# Altium PCB System Control.PcbDoc (part 2 of 7)
Units mil, origin at the board's own origin, x right, y up, seen from the top; angles counter-clockwise.
Board outline 5312.56 x 5103.22 mil, 12 copper layers (Top, GND 2, Signal 3, Signal 4, 3.3V 5, Signal 6, Signal 7, 2.5V 8, Signal 9, Signal 10, GND 11, Bottom); 503 components, 484 nets, 2219 pads, 1158 vias.
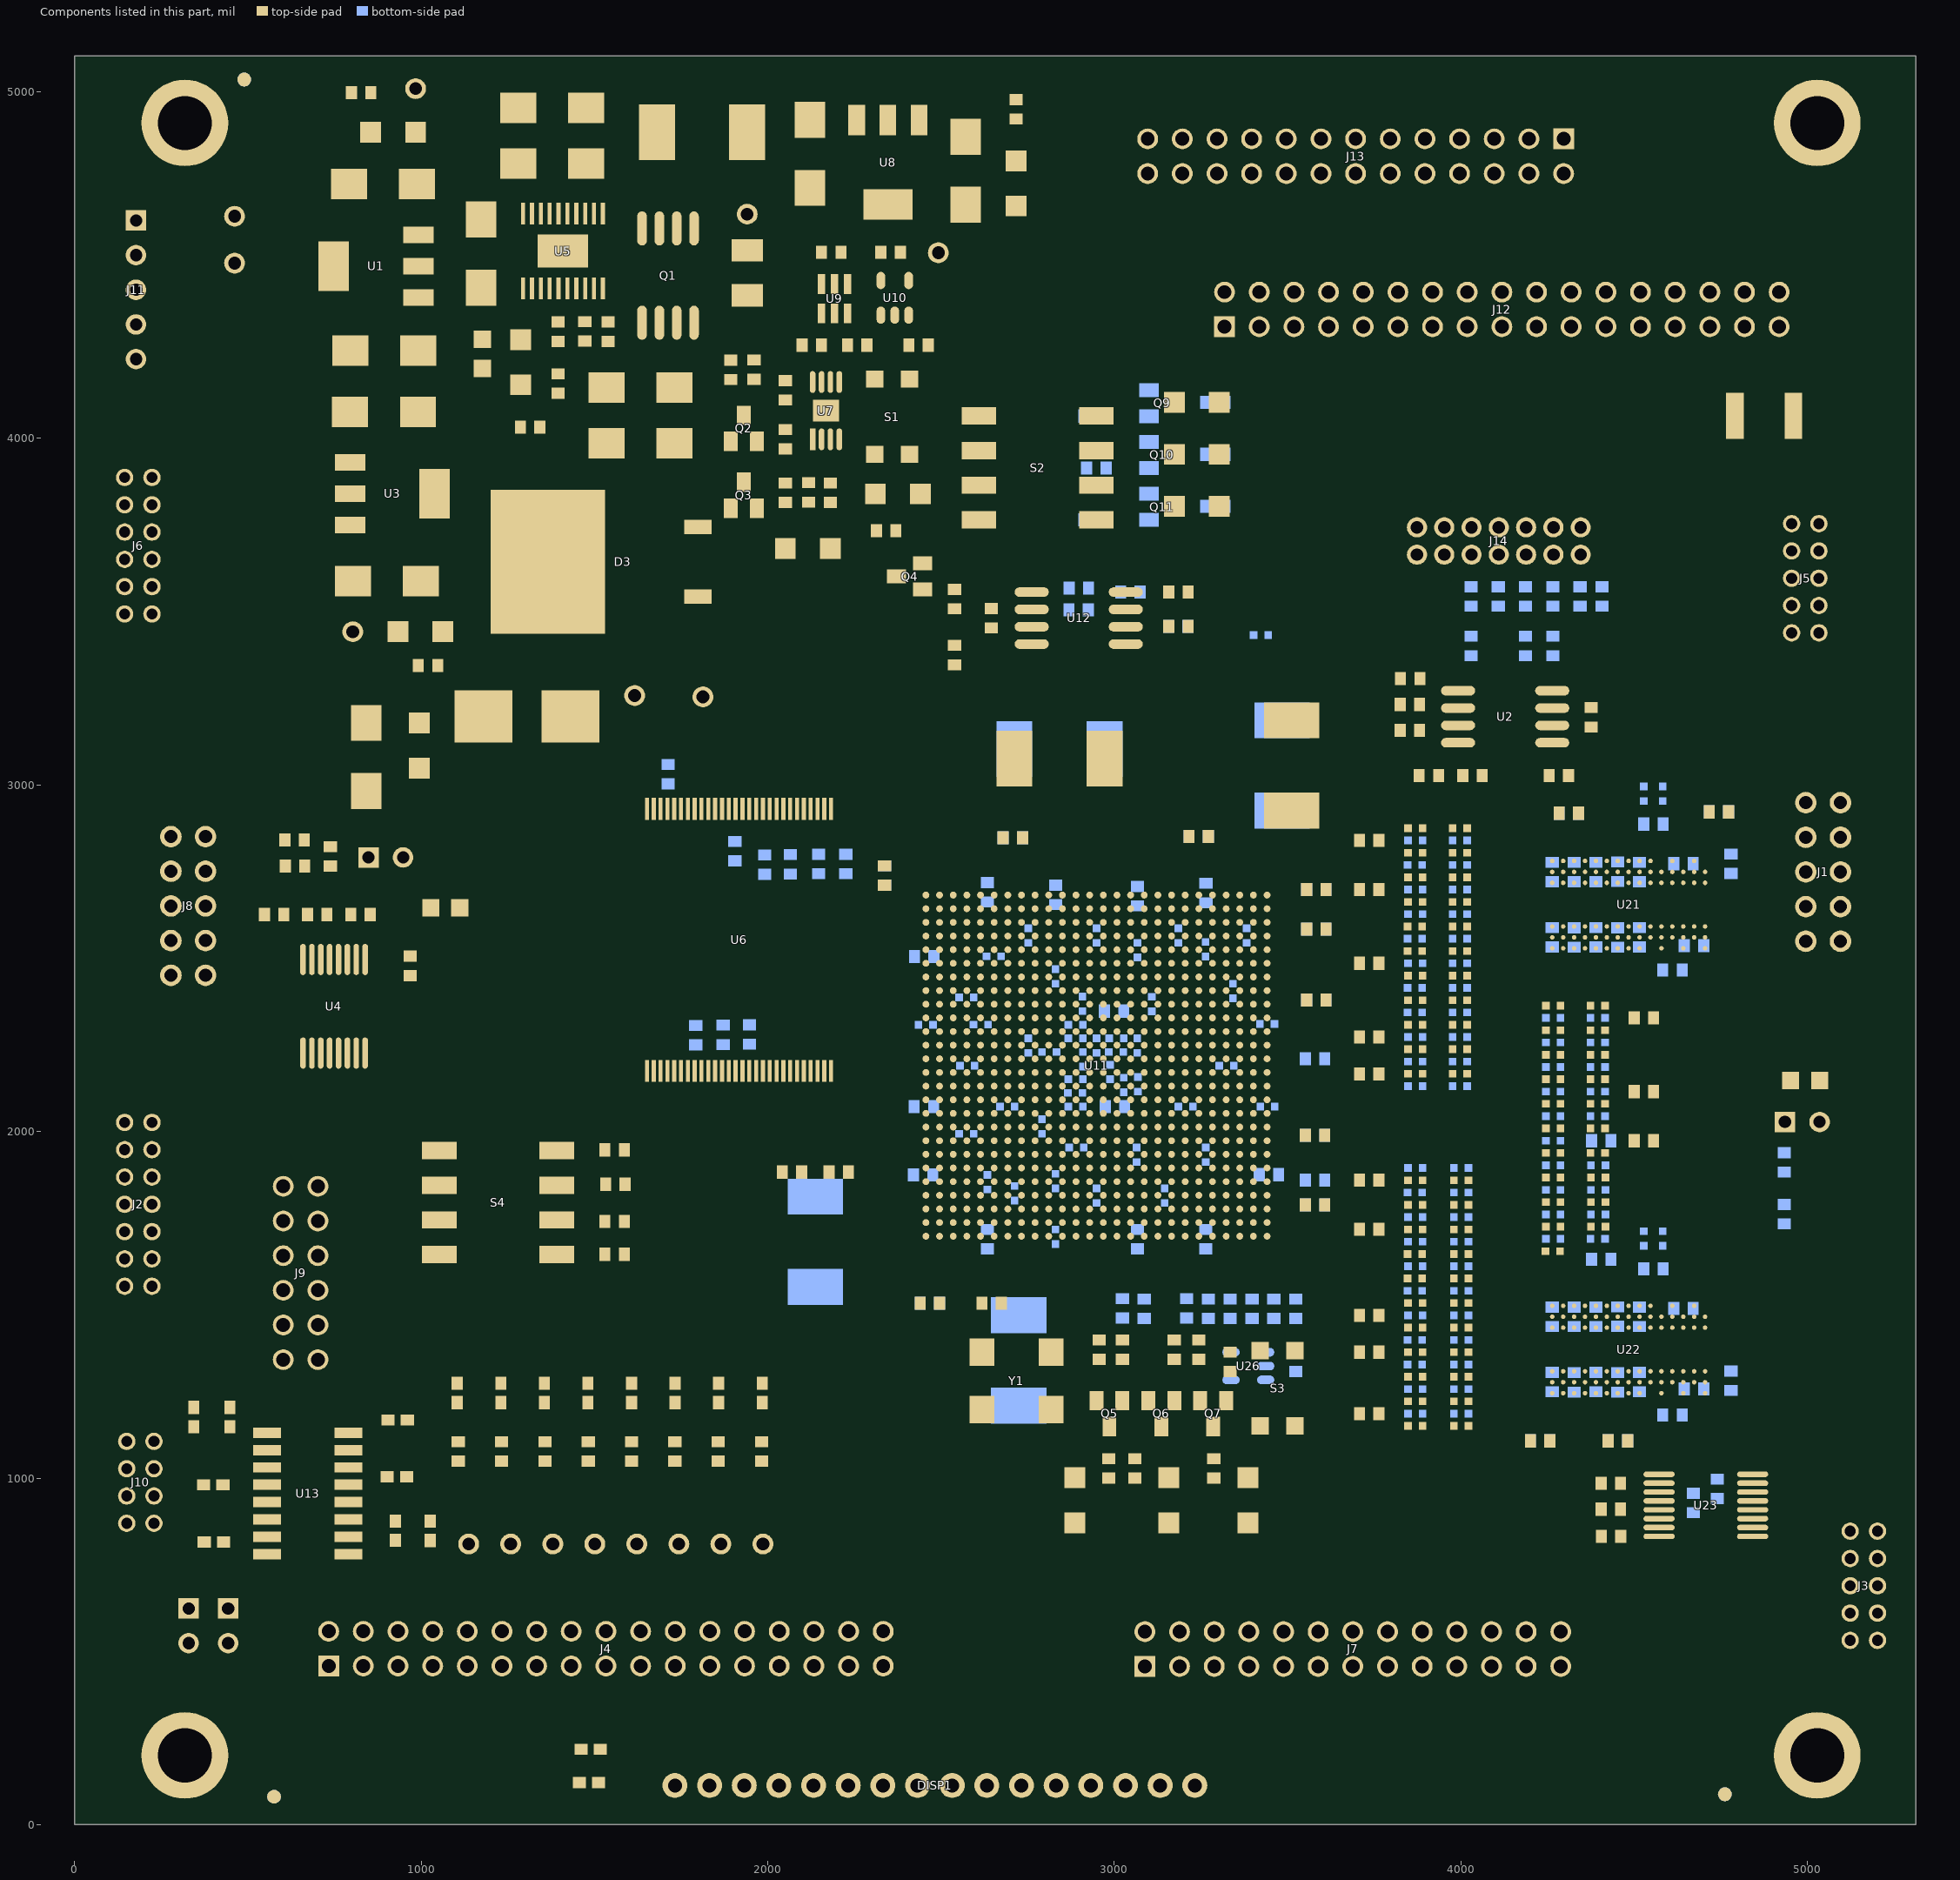
[diagram p12: the components of this part, seen from the top]

## Components (designator, comment, footprint, x,y, rotation, side; value= is the part's Value field where it differs from the comment) (continued)
C4 "10uF 25V" SM/CT_6032 802.71,3587.79 r0 top
C5 "0.1uF 50V" SM/C_0603 737.74,2765.97 r90 top
C6 "1uF 25V" SM/C_0603 968,2506 r270 top
C7 "0.1uF 50V" SM/C_1206 995.03,3178.9 r270 top
C8 "10uF 25V" SM/CT_6032 841.48,3178.9 r270 top
C9 "10uF 25V" SM/CT_6032 1172.78,4631.1 r270 top
C10 "0.1uF 50V" SM/C_0603 852.74,2625.97 r180 top
C11 "10uF 25V" SM/CT_6032 1475.93,4953.94 r180 top
C12 "10uF 25V" SM/CT_6032 1475.93,4792.52 r180 top
C13 "1uF 25V" SM/C_0603 547.74,2625.97 r0 top
C14 "1uF 25V" SM/C_0603 727.74,2625.97 r180 top
C15 "4.7uF" SM/C_0603 1395.22,4186.22 r270 top
C16 "DNP" SM/C_0603 662.74,2840.97 r180 top
C17 "0.033uF" SM/C_0603 1538.93,4335.83 r270 top
C18 "0.1uF 50V" SM/C_0603 4375.4,3167.23 r90 top
C19 "DNP" SM/C_0603 4005.4,3027.23 r0 top
C20 "DNP" SM/C_0603 3880.4,3232.23 r180 top
C21 "0.1uF 50V" SM/C_0603 1472,4280.71 r90 top
C22 "10uF 25V" SM/CT_6032 1534.99,4146.85 r0 top
C23 "10uF 25V" SM/CT_6032 1534.99,3985.43 r0 top
C25 "100uF 25V" SM/CT_7360 1940.5,4883.07 r180 top
C31 "DNP" SM/C_0603 1960.18,4170.47 r90 top
C32 "0.1uF 50V" SM/C_0603 1905,2837 r270 bottom
C34 "0.1uF 50V" SM/C_0603 2050.74,4166.53 r270 top
C35 "470uF 10V" SM/CT_7360 2971.41,3076.1 r180 top
C36 "4.7uF" SM/C_0603 2097.98,1883.07 r180 top
C37 "10uF 25V" SM/CT_6032 2121.6,4918.5 r270 top
C38 "10uF 25V" SM/CT_6032 2570.42,4674.41 r90 top
C42 "0.1uF 50V" SM/C_0603 2155.07,4536.61 r0 top
C43 "4.7uF" SM/C_0603 2176.72,1883.07 r0 top
C44 "0.1uF 50V" SM/C_0603 2326.33,4536.61 r0 top
C45 "4.7uF" SM/C_0603 2336.93,2710.69 r90 top
C46 "4.7uF" SM/C_0603 2495.62,1505.12 r180 top
C47 "0.1uF 50V" SM/C_0603 2617.67,1505.12 r0 top
C48 "0.1uF 50V" SM/C_0603 2645.22,3509.05 r270 top
C49 "4.7uF" SM/C_0603 2678.98,2847.64 r0 top
C50 "4.7uF" SM/C_0603 3271.21,2851.57 r180 top
C51 "DNP" SM/C_0603 3157.04,3556.3 r0 top
C52 "DNP" SM/C_0603 3157.04,3457.87 r0 top
C53 "0.1uF 50V" SM/C_0603 3334.2,1363.39 r270 top
C54 "470uF 10V" SM/CT_7360 3511.37,2926.38 r90 top
C55 "1uF 25V" SM/C_0603 3550.74,1989.37 r0 top
C56 "1uF 25V" SM/C_0603 3550.74,1788.58 r0 top
C57 "0.1uF 50V" SM/C_0603 3763.34,2839.76 r180 top
C58 "10nF 50V" SM/C_0603 3763.34,2698.03 r180 top
C59 "4.7uF" SM/C_0603 3554.67,2583.86 r0 top
C60 "0.01uF 50V" SM/C_0603 3554.67,2698.03 r0 top
C61 "10nF 50V" SM/C_0603 3763.34,2485.43 r180 top
C62 "10nF 50V" SM/C_0603 3763.34,2272.83 r180 top
C63 "1uF 25V" SM/C_0603 3554.67,2379.13 r0 top
C64 "0.1uF 50V" SM/C_0603 3763.34,2166.53 r180 top
C65 "0.1uF 50V" SM/C_0603 3763.34,1859.45 r180 top
C66 "10nF 50V" SM/C_0603 3763.34,1717.72 r180 top
C67 "10nF 50V" SM/C_0603 3763.34,1469.68 r180 top
C68 "10nF 50V" SM/C_0603 3763.34,1363.39 r180 top
C69 "0.1uF 50V" SM/C_0603 3763.34,1186.22 r180 top
C76 "10nF 50V" SM/C_0603 4200.34,1107.48 r0 top
C77 "10nF 50V" SM/C_0603 4283.02,2918.5 r0 top
C78 "10nF 50V" SM/C_0603 4424.75,1107.48 r0 top
C79 "0.1uF 50V" SM/C_0603 4460.19,985.43 r180 top
C80 "1uF 25V" SM/C_0603 4405.07,831.89 r0 top
C81 "1uF 25V" SM/C_0603 4460.19,910.63 r180 top
C85 "10nF 50V" SM/C_0603 4499.56,2327.95 r0 top
C86 "10nF 50V" SM/C_0603 4499.56,2115.35 r0 top
C87 "10nF 50V" SM/C_0603 4499.56,1973.62 r0 top
C88 "10nF 50V" SM/C_0603 4716.09,2922.44 r0 top
C100 "0.1uF 50V" SM/C_0603 1792,2250 r90 bottom
C102 "470uF 10V" SM/CT_7360 2137.35,1812.2 r270 bottom
C104 "4.7uF" SM/C_0603 2336.93,2710.69 r90 bottom
C105 "470uF 10V" SM/CT_7360 2971.41,3103.66 r180 bottom
C106 "1uF 10V" SM/C_0603 2479.3,2505.19 r180 bottom
C107 "0.01uF 25V" SM/C_0402 2476.8,2308.19 r180 bottom
C108 "1uF 10V" SM/C_0603 2478.3,2072.19 r180 bottom
C109 "0.01uF 25V" SM/C_0402 2594.04,1993.31 r180 bottom
C110 "1uF 10V" SM/C_0603 2475.93,1875.19 r180 bottom
C112 "4.7uF" SM/C_0603 2495.62,1505.12 r180 bottom
C113 "0.01uF 25V" SM/C_0402 2593.3,2308.69 r0 bottom
C115 "4.7uF" SM/C_0603 2678.98,2847.64 r0 bottom
C116 "1uF 10V" SM/C_0603 2633.41,2662.6 r90 bottom
C117 "0.01uF 25V" SM/C_0402 2594.04,2387.01 r180 bottom
C118 "0.01uF 25V" SM/C_0402 2631.3,2505.69 r0 bottom
C119 "0.01uF 25V" SM/C_0402 2596.8,2189.69 r180 bottom
C120 "0.01uF 25V" SM/C_0402 2712.15,2072.04 r180 bottom
C121 "0.01uF 25V" SM/C_0402 2830.26,1835.82 r90 bottom
C122 "0.01uF 25V" SM/C_0402 2633.3,1833.19 r90 bottom
C123 "1uF 10V" SM/C_0603 2633.41,1717.72 r270 bottom
C124 "470uF 10V" SM/CT_7360 2723.96,1469.68 r270 bottom
C125 "0.01uF 25V" SM/C_0402 2751.53,2268.9 r270 bottom
C126 "0.01uF 25V" SM/C_0402 2790.89,2229.53 r0 bottom
C127 "0.01uF 25V" SM/C_0402 2790.89,1993.3 r90 bottom
C129 "0.01uF 25V" SM/C_0402 2751.53,2544.49 r90 bottom
C130 "0.01uF 25V" SM/C_0402 2830.26,2426.38 r90 bottom
C131 "0.01uF 25V" SM/C_0402 2909.01,2308.27 r180 bottom
C132 "0.01uF 25V" SM/C_0402 2712.3,1843.19 r270 bottom
C133 "0.01uF 25V" SM/C_0402 2830.26,1717.71 r270 bottom
C134 "1uF 10V" SM/C_0603 2830.3,2654.69 r90 bottom
C135 "0.01uF 25V" SM/C_0402 2907.8,2347.19 r90 bottom
C136 "0.01uF 25V" SM/C_0402 2948.37,2268.9 r270 bottom
C137 "0.01uF 25V" SM/C_0402 2987.75,2150.79 r90 bottom
C138 "0.01uF 25V" SM/C_0402 2909,2072.05 r180 bottom
C139 "0.01uF 25V" SM/C_0402 2909,2150.79 r180 bottom
C140 "0.01uF 25V" SM/C_0402 2909,2268.9 r180 bottom
C141 "0.01uF 25V" SM/C_0402 2909,2229.53 r270 bottom
C142 "0.01uF 25V" SM/C_0402 2865.7,2111.42 r0 bottom
C143 "0.01uF 25V" SM/C_0402 2869.63,1953.93 r0 bottom
C145 "0.01uF 25V" SM/C_0402 2948.37,2544.49 r90 bottom
C146 "1uF 10V" SM/C_0603 3027.12,2347.64 r180 bottom
C147 "0.01uF 25V" SM/C_0402 3027.11,2268.9 r180 bottom
C148 "0.01uF 25V" SM/C_0402 3066.49,2544.49 r270 bottom
C149 "0.01uF 25V" SM/C_0402 3065.8,2227.19 r90 bottom
C150 "0.01uF 25V" SM/C_0402 3067.8,2115.19 r90 bottom
C151 "0.01uF 25V" SM/C_0402 2983.81,2229.53 r0 bottom
C152 "0.01uF 25V" SM/C_0402 3026.8,2155.69 r270 bottom
C153 "1uF 10V" SM/C_0603 3029.8,2071.69 r180 bottom
C154 "0.01uF 25V" SM/C_0402 2948.38,1835.82 r270 bottom
C155 "1uF 10V" SM/C_0603 3066.49,1717.71 r270 bottom
C156 "1uF 10V" SM/C_0603 3067,2651 r90 bottom
C157 "0.01uF 25V" SM/C_0402 3263,2547 r270 bottom
C158 "0.01uF 25V" SM/C_0402 3184.6,2544.49 r90 bottom
C159 "0.01uF 25V" SM/C_0402 3108.3,2388.69 r270 bottom
C160 "0.01uF 25V" SM/C_0402 3063.8,1954.19 r270 bottom
C161 "0.01uF 25V" SM/C_0402 3145.22,1835.82 r270 bottom
C163 "4.7uF" SM/C_0603 3271.21,2851.57 r180 bottom
C164 "0.01uF 25V" SM/C_0402 3302.71,2190.16 r0 bottom
C165 "0.01uF 25V" SM/C_0402 3263.3,1954.19 r270 bottom
C167 "0.01uF 25V" SM/C_0402 3184.6,2072.04 r0 bottom
C168 "1uF 10V" SM/C_0603 3264.3,2660.19 r90 bottom
C169 "1uF 10V" SM/C_0603 3263.33,1717.71 r270 bottom
C170 "0.1uF 50V" SM/C_0603 4343.63,3572.02 r270 bottom
C171 "0.1uF 50V" SM/C_0603 4406.62,3572.02 r270 bottom
C172 "470uF 10V" SM/CT_7360 3483.81,2926.38 r90 bottom
C173 "0.01uF 25V" SM/C_0402 3381.45,2544.49 r90 bottom
C174 "0.01uF 25V" SM/C_0402 3420.82,2072.04 r0 bottom
C175 "4.7uF" SM/C_0603 3417.8,1875.69 r0 bottom
C178 "0.01uF 25V" SM/C_0402 3419.8,2310.69 r0 bottom
C179 "1uF 10V" SM/C_0603 3550.8,2210.19 r0 bottom
C180 "0.01uF 50V" SM/C_0603 3550.74,1989.37 r0 bottom
C181 "1uF 10V" SM/C_0603 3550.74,1859.45 r0 bottom
C182 "0.01uF 50V" SM/C_0603 3550.74,1788.58 r0 bottom
C183 "0.1uF 50V" SM/C_0603 3523.18,1363.39 r270 bottom
C185 "0.01uF 50V" SM/C_0603 3554.67,2698.03 r0 bottom
C186 "1uF 10V" SM/C_0603 3554.67,2583.86 r0 bottom
C187 "0.01uF 50V" SM/C_0603 3554.67,2379.13 r0 bottom
C205 "0.1uF 50V" SM/C_0603 4200.34,1107.48 r0 bottom
C208 "0.1uF 50V" SM/C_0603 4283.02,2918.5 r0 bottom
C209 "0.1uF 50V" SM/C_0603 4263.34,2776.77 r270 bottom
C210 "10nF 50V" SM/C_0603 4326.33,2776.77 r270 bottom
C211 "0.1uF 50V" SM/C_0603 4263.34,2532.68 r90 bottom
C212 "10nF 50V" SM/C_0603 4326.33,2587.79 r270 bottom
C213 "0.1uF 50V" SM/C_0603 4263.34,1493.31 r270 bottom
C214 "10nF 50V" SM/C_0603 4326.33,1493.31 r270 bottom
C215 "0.1uF 50V" SM/C_0603 4263.34,1249.21 r90 bottom
C216 "10nF 50V" SM/C_0603 4326.33,1304.33 r270 bottom
C225 "10nF 50V" SM/C_0603 4452.31,2721.65 r90 bottom
C226 "0.1uF 50V" SM/C_0603 4389.32,2776.77 r270 bottom
C227 "0.1uF 50V" SM/C_0603 4389.32,2532.68 r90 bottom
C228 "10nF 50V" SM/C_0603 4452.31,2587.79 r270 bottom
C229 "10nF 50V" SM/C_0603 4432.63,1631.1 r180 bottom
C230 "10nF 50V" SM/C_0603 4452.31,1438.19 r90 bottom
C231 "0.1uF 50V" SM/C_0603 4389.32,1493.31 r270 bottom
C232 "0.1uF 50V" SM/C_0603 4389.32,1249.21 r90 bottom
C233 "10nF 50V" SM/C_0603 4452.31,1304.33 r270 bottom
C234 "0.1uF 50V" SM/C_0603 4424.75,1107.48 r0 bottom
C235 "0.1uF 50V" SM/C_0603 4515.3,2776.77 r270 bottom
C236 "0.1uF 50V" SM/C_0603 4515.3,2532.68 r90 bottom
C237 "0.1uF 50V" SM/C_0603 4515.3,1493.31 r270 bottom
C238 "0.1uF 50V" SM/C_0603 4515.3,1249.21 r90 bottom
C240 "10nF 50V" SM/C_0603 4613.73,2772.83 r0 bottom
C241 "10nF 50V" SM/C_0603 4700.34,2536.61 r180 bottom
C242 "10nF 50V" SM/C_0603 4582.23,2465.75 r0 bottom
C243 "10nF 50V" SM/C_0603 4613.73,1489.37 r0 bottom
C244 "10nF 50V" SM/C_0603 4700.34,1257.09 r180 bottom
C245 "10nF 50V" SM/C_0603 4582.23,1182.28 r0 bottom
C246 "0.1uF 50V" SM/C_0603 4716.09,2922.44 r0 bottom
C247 "4.7uF" SM/C_0603 4779.08,2800.39 r270 bottom
C248 "0.1uF 50V" SM/C_0603 4739.71,997.24 r270 bottom
C251 "4.7uF" SM/C_0603 4779.08,1253.15 r90 bottom
C252 "DNP" SM/C_0603 4932.63,1883.07 r90 bottom
C253 "1uF 25V" SM/C_0603 4670.63,956.13 r270 bottom
D1 "RED" "LED 1206" 983.81,4883.07 r180 top
D2 "RED" "LED 1206" 932.63,3442.13 r0 top
D3 "MBRB2535CTLT4G" D2PAK 1581.64,3643.82 r90 top
D4 "RED" "LED 1206" 1286.96,4284.64 r270 top
D5 "RED" "LED 1206" 2180.66,3682.28 r180 top
D6 "BLUE" "LED 1206" 2440.5,3839.76 r180 top
D8 "RED" "LED 1206" 2716.09,4670.47 r90 top
D9 "RED" "LED 1206" 2885.38,871.26 r90 top
D12 "RED" "LED 1206" 3157.04,871.26 r90 top
D13 "RED" "LED 1206" 3172.78,4103.54 r0 top
D14 "RED" "LED 1206" 3172.78,3953.94 r0 top
D15 "RED" "LED 1206" 3172.78,3804.33 r0 top
D16 "RED" "LED 1206" 3385.38,871.26 r90 top
DISP1 "LCD_HEADER_1X16_1" "LCD_HEADER_16X2_2 - SIMPLE" 1732.01,113.33 r0 top
F1 "Fiducial" FIDUCAL 489.36,5035.31 r0 top
F2 "Fiducial" FIDUCAL 575.43,80.98 r0 top
F3 "3A" "SMD - Fuse" 1180.02,3197.48 r0 top
F4 "Fiducial" FIDUCAL 4761.38,88.03 r0 top
J1 "CON REMOTE DB9" "RS232 HEADER" 5095,2549 r0 top
J2 "LED Driver" HEADER_2X7_1 223.1,2026.34 r90 top
J3 "Sensor I/F A" HEADER_2X5_1 5123,532 r270 top
J4 "" HEADER_2X17_2 733,458 r0 top
J5 "Sensor I/F B" HEADER_2X5_1 4954,3439 r270 top
J6 "Motor Drive" HEADER_2X6_1 223.1,3887.08 r90 top
J7 "" HEADER_2X13_2 3088,458 r0 top
J8 "CON REMOTE DB9" "RS232 HEADER" 277.74,2850.97 r180 top
J9 "HEADER_2X6_1" HEADER_2X6_2 702,1342 r90 top
J10 "HEADER_2X4_1" HEADER_2X4_1 229,1106 r90 top
J11 "PWR CONTROL" HDR1X5 177.15,4628.7 r270 top
J12 "" HEADER_2X17_2 3318,4322 r0 top
J13 "" HEADER_2X13_2 4296,4863 r180 top
J14 "Header 7X2" 87831-1420 4109.26,3703.83 r180 top
L1 "2.2uH" IHLP-1616BZ-11 1940.5,4477.56 r90 top
L2 "DNP" "TDX Inductor" 4874.53,4065 r0 top
LD0 "LED" SM/D_0603 1982,1049 r90 top
LD1 "LED" SM/D_0603 1857,1049 r90 top
LD2 "LED" SM/D_0603 1732,1049 r90 top
LD3 "LED" SM/D_0603 1607,1049 r90 top
LD4 "LED" SM/D_0603 1482,1049 r90 top
LD5 "LED" SM/D_0603 1357,1049 r90 top
LD6 "LED" SM/D_0603 1232,1049 r90 top
LD7 "LED" SM/D_0603 1107,1049 r90 top
MT1 "DNP" STANDOFF_0.156 318,200 r0 top
MT2 "DNP" STANDOFF_0.156 5028,200 r0 top
MT3 "DNP" STANDOFF_0.156 318,4910 r0 top
MT4 "DNP" STANDOFF_0.156 5028,4910 r0 top
Q1 "FDS6961A" SO8W_M 1712.15,4469.68 r270 top
Q2 "NDS355" TO236AA/SOT23 1893.26,3997.24 r0 top
Q3 "NDS355" TO236AA/SOT23 1893.26,3804.33 r0 top
Q4 "NDS355" TO236AA/SOT23 2440.5,3564.17 r90 top
Q5 "NDS355" TO236AA/SOT23 3023.18,1217.72 r180 top
Q6 "NDS355" TO236AA/SOT23 3172.78,1217.72 r180 top
Q7 "NDS355" TO236AA/SOT23 3322.39,1217.72 r180 top
Q9 "NDS355" TO236AA/SOT23 3105.85,4064.17 r90 bottom
Q10 "NDS355" TO236AA/SOT23 3105.85,3914.57 r90 bottom
Q11 "NDS355" TO236AA/SOT23 3105.85,3764.96 r90 bottom
R1 "100k 0.1%" SM/R_0805 1176.72,4201.97 r90 top
R2 "1K 5%" SM/R_0603 798.77,4997.24 r0 top
R3 "1K 5%" SM/R_0603 991.6,3344.25 r0 top
R4 "1K 5%" SM/R_0603 1342.07,4032.68 r180 top
R5 "10k 5%" 0603 1456,122 r0 top
R6 "5.11K 1%" SM/R_0603 1395.22,4335.83 r270 top
R7 "750 5%" 0603 1517,218 r180 top
R9 "0" SM/R_0603 607.74,2765.97 r0 top
R10 "100 1%" 0805 1027.74,2645.97 r0 top
R11 "10K 5%" SM/R_0603 3935.4,3027.23 r180 top
R12 "10K 5%" SM/R_0603 3880.4,3157.23 r180 top
R13 "10K 5%" SM/R_0603 4310.4,3027.23 r180 top
R14 "1K 5%" SM/R_0603 1712,3003 r90 bottom
R15 "10K 5%" SM/R_0603 3825.4,3307.23 r0 top
R16 "4.7K 5%" SM/R_0603 2050.74,3969.68 r90 top
R17 "10K 5%" SM/R_0603 1893.26,4225.59 r270 top
R18 "Res1" 0603 1984,1274 r270 top
R19 "1K 5%" SM/R_0603 2050.74,3871.26 r270 top
R20 "6.8K 1%" SM/R_0603 2117.67,3816.14 r90 top
R21 "10K 5%" SM/R_0603 2147,2800 r270 bottom
R22 "10K 5%" SM/R_0603 2155.07,4268.9 r180 top
R23 "1K 5%" SM/R_0603 2369.63,3733.46 r180 top
R24 "10K 5%" SM/R_0603 2229.87,4268.9 r0 top
R25 "30.9K 1%" SM/R_0603 2180.66,3871.26 r270 top
R26 "DNP" SM/R_0603 2225,2744 r90 bottom
R27 "0" SM/R_0603 2065,2799 r270 bottom
R28 "Res1" 0603 1858.29,1274 r270 top
R29 "10K 5%" SM/R_0603 2407.04,4268.9 r0 top
R30 "DNP" SM/R_0603 1991,2798 r270 bottom
R31 "10K 5%" SM/R_0603 2538.93,3564.17 r270 top
R32 "33" SM/R_0603 2538.93,3402.76 r270 top
R33 "1K 5%" SM/R_0603 2716.09,4977.56 r270 top
R34 "Res1" 0603 1732.57,1274 r270 top
R35 "33" SM/R_0603 2956.25,1398.82 r270 top
R36 "Res1" 0603 1606.86,1274 r270 top
R37 "10K 5%" SM/R_0603 3023.18,1398.82 r270 top
R38 "1K 5%" SM/R_0603 2983.81,1056.3 r270 top
R39 "1K 5%" SM/R_0603 3058.61,1056.3 r270 top
R40 "10K 5%" SM/R_0603 3243.65,1398.82 r270 top
R41 "10K 5%" SM/R_0603 3172.78,1398.82 r270 top
R42 "1K 5%" SM/R_0603 3286.96,1056.3 r270 top
R43 "Res1" 0603 1481.14,1274 r270 top
R44 "Res1" 0603 1355.43,1274 r270 top
R45 "Res1" 0603 1229.71,1274 r270 top
R46 "Res1" 0603 1104,1274 r270 top
R47 "10K 5%" SM/R_0603 1530,1947 r0 top
R48 "10K 5%" SM/R_0603 1532,1848 r0 top
R49 "10K 5%" SM/R_0603 1530,1741 r0 top
R50 "10K 5%" SM/R_0603 1530,1646 r0 top
R51 "60.4" SM/R_0402 3889.32,2875.2 r180 top
R52 "60.4" SM/R_0402 3889.32,2804.33 r180 top
R53 "60.4" SM/R_0402 3889.32,2662.6 r180 top
R54 "60.4" SM/R_0402 3889.32,2733.46 r180 top
R55 "24" SM/R_0402 3846.01,2591.73 r0 top
R56 "60.4" SM/R_0402 3889.32,2379.13 r180 top
R57 "24" SM/R_0402 3846.01,2520.87 r0 top
R58 "60.4" SM/R_0402 3889.32,2450 r180 top
R59 "60.4" SM/R_0402 3889.32,2308.27 r180 top
R60 "60.4" SM/R_0402 3889.32,2166.53 r180 top
R61 "60.4" SM/R_0402 3889.32,2237.4 r180 top
R62 "60.4" SM/R_0402 3889.32,1859.45 r180 top
R63 "60.4" SM/R_0402 3889.32,1788.58 r180 top
R64 "60.4" SM/R_0402 3889.32,1717.72 r180 top
R65 "24" SM/R_0402 3846.01,1646.85 r0 top
R66 "60.4" SM/R_0402 3889.32,1505.12 r180 top
R67 "24" SM/R_0402 3846.01,1575.98 r0 top
R68 "60.4" SM/R_0402 3889.32,1434.25 r180 top
R69 "60.4" SM/R_0402 3889.32,1363.39 r180 top
R70 "60.4" SM/R_0402 3889.32,1292.52 r180 top
R71 "60.4" SM/R_0402 3889.32,1221.65 r180 top
R72 "60.4" SM/R_0402 3889.32,1150.79 r180 top
R73 "Res1" 0603 344,1148 r90 top
R74 "Res1" 0603 448,1148 r90 top
R75 "Res1" 0603 960,1168 r180 top
R76 "24" SM/R_0402 3975.93,2875.2 r0 top
R77 "24" SM/R_0402 3975.93,2804.33 r0 top
R78 "24" SM/R_0402 3975.93,2733.46 r0 top
R79 "24" SM/R_0402 3975.93,2662.6 r0 top
R80 "60.4" SM/R_0402 3975.93,2591.73 r0 top
R81 "60.4" SM/R_0402 3975.93,2520.87 r0 top
R82 "24" SM/R_0402 3975.93,2450 r0 top
R83 "24" SM/R_0402 3975.93,2379.13 r0 top
R84 "24" SM/R_0402 3975.93,2308.27 r0 top
R85 "24" SM/R_0402 3975.93,2166.53 r0 top
R86 "24" SM/R_0402 3975.93,2237.4 r0 top
R87 "24" SM/R_0402 3979.87,1859.45 r0 top
R88 "24" SM/R_0402 3979.87,1788.58 r0 top
R89 "24" SM/R_0402 3979.87,1717.72 r0 top
R90 "60.4" SM/R_0402 3979.87,1646.85 r0 top
R91 "24" SM/R_0402 3979.87,1505.12 r0 top
R92 "60.4" SM/R_0402 3979.87,1575.98 r0 top
R93 "24" SM/R_0402 3979.87,1434.25 r0 top
R94 "24" SM/R_0402 3979.87,1292.52 r0 top
R95 "24" SM/R_0402 3979.87,1363.39 r0 top
R96 "24" SM/R_0402 3979.87,1221.65 r0 top
R97 "24" SM/R_0402 3979.87,1150.79 r0 top
R98 "Res1" 0603 958,1004 r180 top
R99 "Res1" 0603 1026,876 r270 top
R100 "Res1" 0603 925.7,876.31 r270 top
R101 "Res1" 0603 428,981 r180 top
R102 "33" SM/R_0402 4286.96,2363.39 r180 top
R103 "33" SM/R_0402 4286.96,2292.52 r180 top
R104 "33" SM/R_0402 4286.96,2221.65 r180 top
R105 "33" SM/R_0402 4286.96,2079.92 r180 top
R106 "33" SM/R_0402 4286.96,2150.79 r180 top
R107 "33" SM/R_0402 4286.96,2009.05 r180 top
R108 "60.4" SM/R_0402 4286.96,1867.32 r180 top
R109 "33" SM/R_0402 4286.96,1938.19 r180 top
R110 "60.4" SM/R_0402 4286.96,1796.46 r180 top
R111 "60.4" SM/R_0402 4286.96,1725.59 r180 top
R112 "33" SM/R_0402 4243.65,1654.72 r0 top
R113 "33" SM/R_0402 4416.88,1867.32 r180 top
R114 "33" SM/R_0402 4416.88,1796.46 r180 top
R115 "33" SM/R_0402 4416.88,1725.59 r180 top
R116 "Res1" 0603 430,816 r180 top
R117 "60.4" SM/R_0402 4373.57,2292.52 r0 top
R118 "60.4" SM/R_0402 4373.57,2363.39 r0 top
R119 "60.4" SM/R_0402 4373.57,2221.65 r0 top
R120 "60.4" SM/R_0402 4373.57,2079.92 r0 top
R121 "60.4" SM/R_0402 4373.57,2150.79 r0 top
R122 "60.4" SM/R_0402 4373.57,2009.05 r0 top
R123 "60.4" SM/R_0402 4373.57,1938.19 r0 top
R129 "100 1%" SM/R_0805 5034.99,2146.85 r180 top
R146 "10K 5%" SM/R_0603 1947,2252 r90 bottom
R147 "10K 5%" SM/R_0603 1871,2307 r270 bottom
R150 "10K 5%" SM/R_0603 2924.75,3505.12 r180 bottom
R152 "10K 5%" SM/R_0603 2968.06,4064.17 r180 bottom
R153 "10K 5%" SM/R_0603 2975.93,3914.57 r180 bottom
R154 "10K 5%" SM/R_0603 2869.63,3568.11 r0 bottom
R155 "10K 5%" SM/R_0603 2968.06,3764.96 r180 bottom
R156 "10K 5%" SM/R_0603 3074.36,3556.3 r180 bottom
R157 "49.9 1%" SM/R_0603 4028.91,3515.68 r90 bottom
R158 "4.7K 5%" SM/R_0603 4028.91,3429.07 r270 bottom
R159 "DNP" SM/R_0603 3023.18,1461.81 r90 bottom
R160 "49.9 1%" SM/R_0603 4107.65,3515.68 r90 bottom
R163 "10K 5%" SM/R_0603 3212.15,3457.87 r180 bottom
R164 "24" SM/R_0402 3443.8,3432.19 r180 bottom
R165 "10K 5%" SM/R_0603 3086.17,1516.93 r270 bottom
R166 "49.9 1%" SM/R_0603 4186.39,3515.68 r90 bottom
R167 "4.7K 5%" SM/R_0603 4186.39,3429.07 r270 bottom
R168 "60.4" SM/R_0402 3342.08,2426.38 r270 bottom
R170 "4.7K 5%" SM/R_0603 3208.22,1461.81 r90 bottom
R171 "49.9 1%" SM/R_0603 4265.13,3515.68 r90 bottom
R172 "4.7K 5%" SM/R_0603 4265.13,3429.07 r270 bottom
R174 "1K 5%" SM/R_0603 3263.34,4103.54 r0 bottom
R175 "1K 5%" SM/R_0603 3263.34,3953.94 r0 bottom
R176 "1K 5%" SM/R_0603 3263.34,3804.33 r0 bottom
R177 "DNP" SM/R_0603 3271.21,1516.93 r270 bottom
R178 "4.7K 5%" SM/R_0603 3334.2,1516.93 r270 bottom
R180 "0" SM/R_0603 3397.19,1516.93 r270 bottom
R182 "DNP" SM/R_0603 3460.19,1516.93 r270 bottom
R183 "10K 5%" SM/R_0603 3523.18,1516.93 r270 bottom
R192 "60.4" SM/R_0402 3889.32,2839.76 r180 bottom
R193 "60.4" SM/R_0402 3889.32,2698.03 r180 bottom
R194 "24" SM/R_0402 3846.01,2768.9 r0 bottom
R195 "60.4" SM/R_0402 3889.32,2627.16 r180 bottom
R196 "60.4" SM/R_0402 3889.32,2485.43 r180 bottom
R197 "24" SM/R_0402 3846.01,2556.3 r0 bottom
R198 "60.4" SM/R_0402 3889.32,2272.83 r180 bottom
R199 "24" SM/R_0402 3846.01,2414.57 r0 bottom
R200 "24" SM/R_0402 3846.01,2343.7 r0 bottom
R201 "60.4" SM/R_0402 3889.32,2201.97 r180 bottom
R202 "60.4" SM/R_0402 3889.32,2131.1 r180 bottom
R203 "60.4" SM/R_0402 3889.32,1894.88 r180 bottom
R204 "24" SM/R_0402 3846.01,1824.02 r0 bottom
R205 "60.4" SM/R_0402 3889.32,1682.28 r180 bottom
R206 "60.4" SM/R_0402 3889.32,1753.15 r180 bottom
R207 "60.4" SM/R_0402 3889.32,1611.42 r180 bottom
R208 "60.4" SM/R_0402 3889.32,1469.68 r180 bottom
R209 "24" SM/R_0402 3846.01,1540.55 r0 bottom
R210 "60.4" SM/R_0402 3889.32,1257.09 r180 bottom
R211 "24" SM/R_0402 3846.01,1327.95 r0 bottom
R212 "24" SM/R_0402 3846.01,1398.82 r0 bottom
R213 "60.4" SM/R_0402 3889.32,1186.22 r180 bottom
R221 "24" SM/R_0402 3975.93,2839.76 r0 bottom
R222 "60.4" SM/R_0402 3975.93,2768.9 r0 bottom
R223 "24" SM/R_0402 3975.93,2627.16 r0 bottom
R224 "24" SM/R_0402 3975.93,2698.03 r0 bottom
R225 "60.4" SM/R_0402 3975.93,2556.3 r0 bottom
R226 "24" SM/R_0402 3975.93,2272.83 r0 bottom
R227 "24" SM/R_0402 3975.93,2485.43 r0 bottom
R228 "60.4" SM/R_0402 3975.93,2414.57 r0 bottom
R229 "60.4" SM/R_0402 3975.93,2343.7 r0 bottom
R230 "24" SM/R_0402 3975.93,2131.1 r0 bottom
R231 "24" SM/R_0402 3975.93,2201.97 r0 bottom
R232 "60.4" SM/R_0402 3979.87,1824.02 r0 bottom
R233 "24" SM/R_0402 3979.87,1894.88 r0 bottom
R234 "24" SM/R_0402 3979.87,1753.15 r0 bottom
R235 "24" SM/R_0402 3979.87,1682.28 r0 bottom
R236 "60.4" SM/R_0402 3979.87,1540.55 r0 bottom
R237 "24" SM/R_0402 3979.87,1611.42 r0 bottom
R238 "24" SM/R_0402 3979.87,1469.68 r0 bottom
R239 "60.4" SM/R_0402 3979.87,1327.95 r0 bottom
R240 "60.4" SM/R_0402 3979.87,1398.82 r0 bottom
R241 "24" SM/R_0402 3979.87,1257.09 r0 bottom
R242 "24" SM/R_0402 3979.87,1186.22 r0 bottom
R260 "33" SM/R_0402 4286.96,2327.95 r180 bottom
R261 "33" SM/R_0402 4286.96,2257.09 r180 bottom
R262 "33" SM/R_0402 4286.96,2186.22 r180 bottom
R263 "33" SM/R_0402 4286.96,2115.35 r180 bottom
R264 "33" SM/R_0402 4286.96,2044.49 r180 bottom
R265 "33" SM/R_0402 4286.96,1973.62 r180 bottom
R266 "60.4" SM/R_0402 4286.96,1902.76 r180 bottom
R267 "60.4" SM/R_0402 4286.96,1831.89 r180 bottom
R268 "60.4" SM/R_0402 4286.96,1761.02 r180 bottom
R269 "33" SM/R_0402 4286.96,1690.16 r180 bottom
R273 "60.4" SM/R_0402 4373.57,2327.95 r0 bottom
R274 "60.4" SM/R_0402 4373.57,2257.09 r0 bottom
R275 "10K 5%" SM/R_0603 4432.63,1973.62 r180 bottom
R276 "60.4" SM/R_0402 4373.57,2186.22 r0 bottom
R277 "60.4" SM/R_0402 4373.57,2115.35 r0 bottom
R278 "33" SM/R_0402 4416.88,1902.76 r180 bottom
R279 "60.4" SM/R_0402 4373.57,2044.49 r0 bottom
R280 "33" SM/R_0402 4416.88,1831.89 r180 bottom
R281 "33" SM/R_0402 4416.88,1761.02 r180 bottom
R282 "60.4" SM/R_0402 4373.57,1690.16 r0 bottom
R284 "33" SM/R_0402 4527.11,2953.94 r90 bottom
R285 "100" SM/R_0603 4527.11,2887.01 r0 bottom
R286 "33" SM/R_0402 4527.11,1670.47 r90 bottom
R287 "100" SM/R_0603 4527.11,1603.54 r0 bottom
R289 "33" SM/R_0402 4582.23,2953.94 r90 bottom
R290 "33" SM/R_0402 4582.23,1670.47 r90 bottom
R294 "0" SM/R_0603 4932.63,1733.46 r90 bottom
S1 "SW-PB" "PBSW SMD" 2308.61,3953.94 r0 top
S2 "SW-DIP4" SPST_SMT8 2609.08,4064.88 r0 top
S3 "SW-PB" "PBSW SMD" 3420.81,1150.79 r0 top
S4 "SW-DIP4" SPST_SMT8 1052,1945 r0 top
TP1 "LID B PWM" BLKCON.100/VH/TM1SQ/W.100/1#1 461.55,4640.71 r90 top
TP2 "LID A PWM" BLKCON.100/VH/TM1SQ/W.100/1#1 461.55,4505.71 r90 top
TP3 "TEST POINT" BLKCON.100/VH/TM1SQ/W.100/1#1 983.81,5009.05 r0 top
TP4 "TEST POINT" BLKCON.100/VH/TM1SQ/W.100/1#1 1616,3258 r0 top
TP5 "TEST POINT" BLKCON.100/VH/TM1SQ/W.100/1#1 1813,3254 r0 top
TP6 "TEST POINT" BLKCON.100/VH/TM1SQ/W.100/1#1 1940.5,4646.85 r90 top
TP7 "TEST POINT" BLKCON.100/VH/TM1SQ/W.100/1#1 2492.07,4535.41 r270 top
TP8 "TEST POINT" BLKCON.100/VH/TM1SQ/W.100/1#2 802.71,3442.13 r0 top
TP9 "TEST POINT" BLKCON.100/VH/TM1SQ/W.100/1#1 1986,810 r90 top
TP10 "TEST POINT" BLKCON.100/VH/TM1SQ/W.100/1#1 1864.71,810 r90 top
TP11 "TEST POINT" BLKCON.100/VH/TM1SQ/W.100/1#1 1743.43,810 r90 top
TP12 "TEST POINT" BLKCON.100/VH/TM1SQ/W.100/1#1 1622.14,810 r90 top
TP13 "TEST POINT" BLKCON.100/VH/TM1SQ/W.100/1#1 1500.86,810 r90 top
TP14 "TEST POINT" BLKCON.100/VH/TM1SQ/W.100/1#1 1379.57,810 r90 top
TP15 "TEST POINT" BLKCON.100/VH/TM1SQ/W.100/1#1 1258.29,810 r90 top
TP16 "TEST POINT" BLKCON.100/VH/TM1SQ/W.100/1#1 1137,810 r90 top
U1 "LT1963AEST-3.3" SM/SOT223_1234 991.68,4406.69 r90 top
U2 "AT45DB161D" 8S2_M#1 3990.4,3272.23 r180 top
U3 "LT1963AEST-2.5" SM/SOT223_1234 794.83,3930.31 r270 top
U4 "MAX3221/SO" 16TSSOP 837.74,2495.97 r270 top
U5 "TPS51116PWP" "TSSOP20 - PWP" 1409,4540.55 r180 top
U6 "JS28F128J3D75" TSOP56 1917,2553 r0 top
U7 "TPS3307-25DGNR" "MSOP8 PowerPAD" 2129.48,3997.24 r90 top
U8 "AP1122EG-13" SM/SOT223_1234 2436.56,4918.5 r180 top
U9 "TPS3808G12DBVR" SOT23-6 2192.47,4402.76 r0 top
U10 "TPS3828-50QDBVRQ1" SOT23-5 2326.33,4355.51 r0 top
U11 "XC3S1400A-4FGG676C" FGG676 2948.37,2190.16 r180 top
U12 "AT45DB161D" 8S2_M#2 2897.19,3481.5 r180 top
U13 "OPTO_ISO_4_1" SO-16_SMALL_OUTLINE 555,1131 r90 top
U21 "MT47H16M16BG-3:B TR" 84FBGA 4483.81,2654.72 r90 top
U22 "MT47H16M16BG-3:B TR" 84FBGA 4483.81,1371.26 r90 top
U23 "MAX3221/SO" SOG.65M/16/WG8.20/L6.35 4571.56,1011.14 r270 top
U26 "SN74AHC1G08" SOT23-5 3436.56,1363.39 r270 bottom
W1 "Jumper" HDR1X2 4934.71,2027.6 r0 top
W2 "Jumper" HDR1X2 847.74,2790.97 r0 top
W3 "Jumper" HDR1X2 329,624 r270 top
W4 "Jumper" HDR1X2 443,624 r270 top
Y1 "125 MHz" FXO_HC73 2617.67,1198.03 r90 top

## Footprints (in the part's own frame and the unit in brackets; to place one, negate y for a bottom-side part, rotate by r counter-clockwise, add the part's x,y. Pads: shape width x height; smd on the part's side, far side on the other; paste and mask are expansions set on the pad)
8S2_M#1 [mm] "8 PIN SMALL PACKAGE IC"
  oval 2.5x0.7 smd: 1(-0.033,0.007) 2(-0.033,1.277) 3(-0.033,2.547) 4(-0.033,3.817) 5(-6.933,3.817) 6(-6.933,2.547) 7(-6.933,1.277) 8(-6.933,0.007)
  silkscreen extent -5.28,-1.02 0.09,4.66
8S2_M#2 [mm]
  oval 2.5x0.7 smd: 1(-3.45,1.905) 2(-3.45,0.635) 3(-3.45,-0.635) 4(-3.45,-1.905) 5(3.45,-1.905) 6(3.45,-0.635) 7(3.45,0.635) 8(3.45,1.905)
  silkscreen extent -3.58,-2.75 1.8,2.93
16TSSOP [mil]
  oval 90x16 smd: 1(-0.46,0.4) 2(-0.46,-25.2) 3(-0.46,-50.8) 4(-0.46,-76.4) 5(-0.46,-102) 6(-0.46,-127.6) 7(-0.46,-153.2) 8(-0.46,-178.8) 9(269.54,-178.8) 10(269.54,-153.2) 11(269.54,-127.6) 12(269.54,-102) 13(269.54,-76.4) 14(269.54,-50.8) 15(269.54,-25.2) 16(269.54,0.4)
  silkscreen extent 60,-214 210,36
84FBGA [mm]
  round 0.33 smd: A1(-3.2,5.6) A2(-2.4,5.6) A3(-1.6,5.6) A7(1.6,5.6) A8(2.4,5.6) A9(3.2,5.6) B1(-3.2,4.8) B2(-2.4,4.8) B3(-1.6,4.8) B7(1.6,4.8) B8(2.4,4.8) B9(3.2,4.8) C1(-3.2,4) C2(-2.4,4) C3(-1.6,4) C7(1.6,4) C8(2.4,4) C9(3.2,4) D1(-3.2,3.2) D2(-2.4,3.2) D3(-1.6,3.2) D7(1.6,3.2) D8(2.4,3.2) D9(3.2,3.2) E1(-3.2,2.4) E2(-2.4,2.4) E3(-1.6,2.4) E7(1.6,2.4) E8(2.4,2.4) E9(3.2,2.4) F1(-3.2,1.6) F2(-2.4,1.6) F3(-1.6,1.6) F7(1.6,1.6) F8(2.4,1.6) F9(3.2,1.6) G1(-3.2,0.8) G2(-2.4,0.8) G3(-1.6,0.8) G7(1.6,0.8) G8(2.4,0.8) G9(3.2,0.8) H1(-3.2,0) H2(-2.4,0) H3(-1.6,0) H7(1.6,0) H8(2.4,0) H9(3.2,0) J1(-3.2,-0.8) J2(-2.4,-0.8) J3(-1.6,-0.8) J7(1.6,-0.8) J8(2.4,-0.8) J9(3.2,-0.8) K2(-2.4,-1.6) K3(-1.6,-1.6) K7(1.6,-1.6) K8(2.4,-1.6) K9(3.2,-1.6) L1(-3.2,-2.4) L2(-2.4,-2.4) L3(-1.6,-2.4) L7(1.6,-2.4) L8(2.4,-2.4) M2(-2.4,-3.2) M3(-1.6,-3.2) M7(1.6,-3.2) M8(2.4,-3.2) M9(3.2,-3.2) N1(-3.2,-4) N2(-2.4,-4) N3(-1.6,-4) N7(1.6,-4) N8(2.4,-4) P2(-2.4,-4.8) P3(-1.6,-4.8) P7(1.6,-4.8) P8(2.4,-4.8) P9(3.2,-4.8) R1(-3.2,-5.6) R2(-2.4,-5.6) R3(-1.6,-5.6) R7(1.6,-5.6) R8(2.4,-5.6)
  silkscreen extent -5.65,-8 5,8
0603 [mil] "SMT RES/CAP/ETC"
  rect 38x32 smd: 1(0,0) 2(56,0)
  silkscreen extent -40,-40 100,40
0805 [mil] "SMT res/cap/etc. 0805"
  rect 50x50 smd: 1(0,0) 2(84,0)
  silkscreen extent -50,-50 130,50
87831-1420 [mil]
  round 58 hole 36: 1(-236.22,-39.37) 2(-236.22,39.37) 3(-157.48,-39.37) 4(-157.48,39.37) 5(-78.74,-39.37) 6(-78.74,39.37) 7(0,-39.37) 8(0,39.37) 9(78.74,-39.37) 10(78.74,39.37) 11(157.48,-39.37) 12(157.48,39.37) 13(236.22,-39.37) 14(236.22,39.37)
  silkscreen extent -335,-166 335,126
BLKCON.100/VH/TM1SQ/W.100/1#1 [mil]
  round 60 hole 37: 1(0,0)
  silkscreen extent -50,-50 50,50
BLKCON.100/VH/TM1SQ/W.100/1#2 [mil]
  round 60 / inner round 60 / far side rect 58x58 hole 37: 1(0,0)
  silkscreen extent -50,-50 50,50
D2PAK [mm]
  rect 1.05x2 smd: 1(-2.54,-5.5) 3(2.54,-5.5)
  rect 10.55x8.4 smd: 2(0,5.5)
  silkscreen extent -5.58,-6.4 5.57,9.6
FGG676 [mm] "BGA, 676-Leads, Body 27x27mm, Pitch 1mm"
  round 0.5 smd: A1(-12.5,12.5) A2(-11.5,12.5) A3(-10.5,12.5) A4(-9.5,12.5) A5(-8.5,12.5) A6(-7.5,12.5) A7(-6.5,12.5) A8(-5.5,12.5) A9(-4.5,12.5) A10(-3.5,12.5) A11(-2.5,12.5) A12(-1.5,12.5) A13(-0.5,12.5) A14(0.5,12.5) A15(1.5,12.5) A16(2.5,12.5) A17(3.5,12.5) A18(4.5,12.5) A19(5.5,12.5) A20(6.5,12.5) A21(7.5,12.5) A22(8.5,12.5) A23(9.5,12.5) A24(10.5,12.5) A25(11.5,12.5) A26(12.5,12.5) AA1(-12.5,-7.5) AA2(-11.5,-7.5) AA3(-10.5,-7.5) AA4(-9.5,-7.5) AA5(-8.5,-7.5) AA6(-7.5,-7.5) AA7(-6.5,-7.5) AA8(-5.5,-7.5) AA9(-4.5,-7.5) AA10(-3.5,-7.5) AA11(-2.5,-7.5) AA12(-1.5,-7.5) AA13(-0.5,-7.5) AA14(0.5,-7.5) AA15(1.5,-7.5) AA16(2.5,-7.5) AA17(3.5,-7.5) AA18(4.5,-7.5) AA19(5.5,-7.5) AA20(6.5,-7.5) AA21(7.5,-7.5) AA22(8.5,-7.5) AA23(9.5,-7.5) AA24(10.5,-7.5) AA25(11.5,-7.5) AA26(12.5,-7.5) AB1(-12.5,-8.5) AB2(-11.5,-8.5) AB3(-10.5,-8.5) AB4(-9.5,-8.5) AB5(-8.5,-8.5) AB6(-7.5,-8.5) AB7(-6.5,-8.5) AB8(-5.5,-8.5) AB9(-4.5,-8.5) AB10(-3.5,-8.5) AB11(-2.5,-8.5) AB12(-1.5,-8.5) AB13(-0.5,-8.5) AB14(0.5,-8.5) AB15(1.5,-8.5) AB16(2.5,-8.5) AB17(3.5,-8.5) AB18(4.5,-8.5) AB19(5.5,-8.5) AB20(6.5,-8.5) AB21(7.5,-8.5) AB22(8.5,-8.5) AB23(9.5,-8.5) AB24(10.5,-8.5) AB25(11.5,-8.5) AB26(12.5,-8.5) AC1(-12.5,-9.5) AC2(-11.5,-9.5) AC3(-10.5,-9.5) AC4(-9.5,-9.5) AC5(-8.5,-9.5) AC6(-7.5,-9.5) AC7(-6.5,-9.5) AC8(-5.5,-9.5) AC9(-4.5,-9.5) AC10(-3.5,-9.5) AC11(-2.5,-9.5) AC12(-1.5,-9.5) AC13(-0.5,-9.5) AC14(0.5,-9.5) AC15(1.5,-9.5) AC16(2.5,-9.5) AC17(3.5,-9.5) AC18(4.5,-9.5) AC19(5.5,-9.5) AC20(6.5,-9.5) AC21(7.5,-9.5) AC22(8.5,-9.5) AC23(9.5,-9.5) AC24(10.5,-9.5) AC25(11.5,-9.5) AC26(12.5,-9.5) AD1(-12.5,-10.5) AD2(-11.5,-10.5) AD3(-10.5,-10.5) AD4(-9.5,-10.5) AD5(-8.5,-10.5) AD6(-7.5,-10.5) AD7(-6.5,-10.5) AD8(-5.5,-10.5) AD9(-4.5,-10.5) AD10(-3.5,-10.5) AD11(-2.5,-10.5) AD12(-1.5,-10.5) AD13(-0.5,-10.5) AD14(0.5,-10.5) AD15(1.5,-10.5) AD16(2.5,-10.5) AD17(3.5,-10.5) AD18(4.5,-10.5) AD19(5.5,-10.5) AD20(6.5,-10.5) AD21(7.5,-10.5) AD22(8.5,-10.5) AD23(9.5,-10.5) AD24(10.5,-10.5) AD25(11.5,-10.5) AD26(12.5,-10.5) AE1(-12.5,-11.5) AE2(-11.5,-11.5) AE3(-10.5,-11.5) AE4(-9.5,-11.5) AE5(-8.5,-11.5) AE6(-7.5,-11.5) AE7(-6.5,-11.5) AE8(-5.5,-11.5) AE9(-4.5,-11.5) AE10(-3.5,-11.5) AE11(-2.5,-11.5) AE12(-1.5,-11.5) AE13(-0.5,-11.5) AE14(0.5,-11.5) AE15(1.5,-11.5) AE16(2.5,-11.5) AE17(3.5,-11.5) AE18(4.5,-11.5) AE19(5.5,-11.5) AE20(6.5,-11.5) AE21(7.5,-11.5) AE22(8.5,-11.5) AE23(9.5,-11.5) AE24(10.5,-11.5) AE25(11.5,-11.5) AE26(12.5,-11.5) AF1(-12.5,-12.5) AF2(-11.5,-12.5) AF3(-10.5,-12.5) AF4(-9.5,-12.5) AF5(-8.5,-12.5) AF6(-7.5,-12.5) AF7(-6.5,-12.5) AF8(-5.5,-12.5) AF9(-4.5,-12.5) AF10(-3.5,-12.5) AF11(-2.5,-12.5) AF12(-1.5,-12.5) AF13(-0.5,-12.5) AF14(0.5,-12.5) AF15(1.5,-12.5) AF16(2.5,-12.5) AF17(3.5,-12.5) AF18(4.5,-12.5) AF19(5.5,-12.5) AF20(6.5,-12.5) AF21(7.5,-12.5) AF22(8.5,-12.5) AF23(9.5,-12.5) AF24(10.5,-12.5) AF25(11.5,-12.5) AF26(12.5,-12.5) B1(-12.5,11.5) B2(-11.5,11.5) B3(-10.5,11.5) B4(-9.5,11.5) B5(-8.5,11.5) B6(-7.5,11.5) B7(-6.5,11.5) B8(-5.5,11.5) B9(-4.5,11.5) B10(-3.5,11.5) B11(-2.5,11.5) B12(-1.5,11.5) B13(-0.5,11.5) B14(0.5,11.5) B15(1.5,11.5) B16(2.5,11.5) B17(3.5,11.5) B18(4.5,11.5) B19(5.5,11.5) B20(6.5,11.5) B21(7.5,11.5) B22(8.5,11.5) B23(9.5,11.5) B24(10.5,11.5) B25(11.5,11.5) B26(12.5,11.5) C1(-12.5,10.5) C2(-11.5,10.5) C3(-10.5,10.5) C4(-9.5,10.5) C5(-8.5,10.5) C6(-7.5,10.5) C7(-6.5,10.5) C8(-5.5,10.5) C9(-4.5,10.5) C10(-3.5,10.5) C11(-2.5,10.5) C12(-1.5,10.5) C13(-0.5,10.5) C14(0.5,10.5) C15(1.5,10.5) C16(2.5,10.5) C17(3.5,10.5) C18(4.5,10.5) C19(5.5,10.5) C20(6.5,10.5) C21(7.5,10.5) C22(8.5,10.5) C23(9.5,10.5) C24(10.5,10.5) C25(11.5,10.5) C26(12.5,10.5) D1(-12.5,9.5) D2(-11.5,9.5) D3(-10.5,9.5) D4(-9.5,9.5) D5(-8.5,9.5) D6(-7.5,9.5) D7(-6.5,9.5) D8(-5.5,9.5) D9(-4.5,9.5) D10(-3.5,9.5) D11(-2.5,9.5) D12(-1.5,9.5) D13(-0.5,9.5) D14(0.5,9.5) D15(1.5,9.5) D16(2.5,9.5) D17(3.5,9.5) D18(4.5,9.5) D19(5.5,9.5) D20(6.5,9.5) D21(7.5,9.5) D22(8.5,9.5) D23(9.5,9.5) D24(10.5,9.5) D25(11.5,9.5) D26(12.5,9.5) E1(-12.5,8.5) E2(-11.5,8.5) E3(-10.5,8.5) E4(-9.5,8.5) E5(-8.5,8.5) E6(-7.5,8.5) E7(-6.5,8.5) E8(-5.5,8.5) E9(-4.5,8.5) E10(-3.5,8.5) E11(-2.5,8.5) E12(-1.5,8.5) E13(-0.5,8.5) E14(0.5,8.5) E15(1.5,8.5) E16(2.5,8.5) E17(3.5,8.5) E18(4.5,8.5) E19(5.5,8.5) E20(6.5,8.5) E21(7.5,8.5) E22(8.5,8.5) E23(9.5,8.5) E24(10.5,8.5) E25(11.5,8.5) E26(12.5,8.5) F1(-12.5,7.5) F2(-11.5,7.5) F3(-10.5,7.5) F4(-9.5,7.5) F5(-8.5,7.5) F6(-7.5,7.5) F7(-6.5,7.5) F8(-5.5,7.5) F9(-4.5,7.5) F10(-3.5,7.5) F11(-2.5,7.5) F12(-1.5,7.5) F13(-0.5,7.5) F14(0.5,7.5) F15(1.5,7.5) F16(2.5,7.5) F17(3.5,7.5) F18(4.5,7.5) F19(5.5,7.5) F20(6.5,7.5) F21(7.5,7.5) F22(8.5,7.5) F23(9.5,7.5) F24(10.5,7.5) F25(11.5,7.5) F26(12.5,7.5) G1(-12.5,6.5) G2(-11.5,6.5) G3(-10.5,6.5) G4(-9.5,6.5) G5(-8.5,6.5) G6(-7.5,6.5) G7(-6.5,6.5) G8(-5.5,6.5) G9(-4.5,6.5) G10(-3.5,6.5) G11(-2.5,6.5) G12(-1.5,6.5) G13(-0.5,6.5) G14(0.5,6.5) G15(1.5,6.5) G16(2.5,6.5) G17(3.5,6.5) G18(4.5,6.5) G19(5.5,6.5) G20(6.5,6.5) G21(7.5,6.5) G22(8.5,6.5) G23(9.5,6.5) G24(10.5,6.5) G25(11.5,6.5) G26(12.5,6.5) H1(-12.5,5.5) H2(-11.5,5.5) H3(-10.5,5.5) H4(-9.5,5.5) H5(-8.5,5.5) H6(-7.5,5.5) H7(-6.5,5.5) H8(-5.5,5.5) H9(-4.5,5.5) H10(-3.5,5.5) H11(-2.5,5.5) H12(-1.5,5.5) H13(-0.5,5.5) H14(0.5,5.5) H15(1.5,5.5) H16(2.5,5.5) H17(3.5,5.5) H18(4.5,5.5) H19(5.5,5.5) H20(6.5,5.5) H21(7.5,5.5) H22(8.5,5.5) H23(9.5,5.5) H24(10.5,5.5) H25(11.5,5.5) H26(12.5,5.5) J1(-12.5,4.5) J2(-11.5,4.5) J3(-10.5,4.5) J4(-9.5,4.5) J5(-8.5,4.5) J6(-7.5,4.5) J7(-6.5,4.5) J8(-5.5,4.5) J9(-4.5,4.5) J10(-3.5,4.5) J11(-2.5,4.5) J12(-1.5,4.5) J13(-0.5,4.5) J14(0.5,4.5) J15(1.5,4.5) J16(2.5,4.5) J17(3.5,4.5) J18(4.5,4.5) J19(5.5,4.5) J20(6.5,4.5) J21(7.5,4.5) J22(8.5,4.5) J23(9.5,4.5) J24(10.5,4.5) J25(11.5,4.5) J26(12.5,4.5) K1(-12.5,3.5) K2(-11.5,3.5) K3(-10.5,3.5) K4(-9.5,3.5) K5(-8.5,3.5) K6(-7.5,3.5) K7(-6.5,3.5) K8(-5.5,3.5) K9(-4.5,3.5) K10(-3.5,3.5) K11(-2.5,3.5) K12(-1.5,3.5) K13(-0.5,3.5) K14(0.5,3.5) K15(1.5,3.5) K16(2.5,3.5) K17(3.5,3.5) K18(4.5,3.5) K19(5.5,3.5) K20(6.5,3.5) K21(7.5,3.5) K22(8.5,3.5) K23(9.5,3.5) K24(10.5,3.5) K25(11.5,3.5) K26(12.5,3.5) L1(-12.5,2.5) L2(-11.5,2.5) L3(-10.5,2.5) L4(-9.5,2.5) L5(-8.5,2.5) L6(-7.5,2.5) L7(-6.5,2.5) L8(-5.5,2.5) L9(-4.5,2.5) L10(-3.5,2.5) L11(-2.5,2.5) L12(-1.5,2.5) L13(-0.5,2.5) L14(0.5,2.5) L15(1.5,2.5) L16(2.5,2.5) L17(3.5,2.5) L18(4.5,2.5) L19(5.5,2.5) L20(6.5,2.5) L21(7.5,2.5) L22(8.5,2.5) L23(9.5,2.5) L24(10.5,2.5) L25(11.5,2.5) L26(12.5,2.5) M1(-12.5,1.5) M2(-11.5,1.5) M3(-10.5,1.5) M4(-9.5,1.5) M5(-8.5,1.5) M6(-7.5,1.5) M7(-6.5,1.5) M8(-5.5,1.5) M9(-4.5,1.5) M10(-3.5,1.5) M11(-2.5,1.5) M12(-1.5,1.5) M13(-0.5,1.5) M14(0.5,1.5) M15(1.5,1.5) M16(2.5,1.5) M17(3.5,1.5) M18(4.5,1.5) M19(5.5,1.5) M20(6.5,1.5) M21(7.5,1.5) M22(8.5,1.5) M23(9.5,1.5) M24(10.5,1.5) M25(11.5,1.5) M26(12.5,1.5) N1(-12.5,0.5) N2(-11.5,0.5) N3(-10.5,0.5) N4(-9.5,0.5) N5(-8.5,0.5) N6(-7.5,0.5) N7(-6.5,0.5) N8(-5.5,0.5) N9(-4.5,0.5) N10(-3.5,0.5) N11(-2.5,0.5) N12(-1.5,0.5) N13(-0.5,0.5) N14(0.5,0.5) N15(1.5,0.5) N16(2.5,0.5) N17(3.5,0.5) N18(4.5,0.5) N19(5.5,0.5) N20(6.5,0.5) N21(7.5,0.5) N22(8.5,0.5) N23(9.5,0.5) N24(10.5,0.5) N25(11.5,0.5) N26(12.5,0.5) P1(-12.5,-0.5) P2(-11.5,-0.5) P3(-10.5,-0.5) P4(-9.5,-0.5) P5(-8.5,-0.5) P6(-7.5,-0.5) P7(-6.5,-0.5) P8(-5.5,-0.5) P9(-4.5,-0.5) P10(-3.5,-0.5) P11(-2.5,-0.5) P12(-1.5,-0.5) P13(-0.5,-0.5) P14(0.5,-0.5) P15(1.5,-0.5) P16(2.5,-0.5) P17(3.5,-0.5) P18(4.5,-0.5) P19(5.5,-0.5) P20(6.5,-0.5) P21(7.5,-0.5) P22(8.5,-0.5) P23(9.5,-0.5) P24(10.5,-0.5) P25(11.5,-0.5) P26(12.5,-0.5) R1(-12.5,-1.5) R2(-11.5,-1.5) R3(-10.5,-1.5) R4(-9.5,-1.5) R5(-8.5,-1.5) R6(-7.5,-1.5) R7(-6.5,-1.5) R8(-5.5,-1.5) R9(-4.5,-1.5) R10(-3.5,-1.5) R11(-2.5,-1.5) R12(-1.5,-1.5) R13(-0.5,-1.5) R14(0.5,-1.5) R15(1.5,-1.5) R16(2.5,-1.5) R17(3.5,-1.5) R18(4.5,-1.5) R19(5.5,-1.5) R20(6.5,-1.5) R21(7.5,-1.5) R22(8.5,-1.5) R23(9.5,-1.5) R24(10.5,-1.5) R25(11.5,-1.5) R26(12.5,-1.5) T1(-12.5,-2.5) T2(-11.5,-2.5) T3(-10.5,-2.5) T4(-9.5,-2.5) T5(-8.5,-2.5) T6(-7.5,-2.5) T7(-6.5,-2.5) T8(-5.5,-2.5) T9(-4.5,-2.5) T10(-3.5,-2.5) T11(-2.5,-2.5) T12(-1.5,-2.5) T13(-0.5,-2.5) T14(0.5,-2.5) T15(1.5,-2.5) T16(2.5,-2.5) T17(3.5,-2.5) T18(4.5,-2.5) T19(5.5,-2.5) T20(6.5,-2.5) T21(7.5,-2.5) T22(8.5,-2.5) T23(9.5,-2.5) T24(10.5,-2.5) T25(11.5,-2.5) T26(12.5,-2.5) U1(-12.5,-3.5) U2(-11.5,-3.5) U3(-10.5,-3.5) U4(-9.5,-3.5) U5(-8.5,-3.5) U6(-7.5,-3.5) U7(-6.5,-3.5) U8(-5.5,-3.5) U9(-4.5,-3.5) U10(-3.5,-3.5) U11(-2.5,-3.5) U12(-1.5,-3.5) U13(-0.5,-3.5) U14(0.5,-3.5) U15(1.5,-3.5) U16(2.5,-3.5) U17(3.5,-3.5) U18(4.5,-3.5) U19(5.5,-3.5) U20(6.5,-3.5) U21(7.5,-3.5) U22(8.5,-3.5) U23(9.5,-3.5) U24(10.5,-3.5) U25(11.5,-3.5) U26(12.5,-3.5) V1(-12.5,-4.5) V2(-11.5,-4.5) V3(-10.5,-4.5) V4(-9.5,-4.5) V5(-8.5,-4.5) V6(-7.5,-4.5) V7(-6.5,-4.5) V8(-5.5,-4.5) V9(-4.5,-4.5) V10(-3.5,-4.5) V11(-2.5,-4.5) V12(-1.5,-4.5) V13(-0.5,-4.5) V14(0.5,-4.5) V15(1.5,-4.5) V16(2.5,-4.5) V17(3.5,-4.5) V18(4.5,-4.5) V19(5.5,-4.5) V20(6.5,-4.5) V21(7.5,-4.5) V22(8.5,-4.5) V23(9.5,-4.5) V24(10.5,-4.5) V25(11.5,-4.5) V26(12.5,-4.5) W1(-12.5,-5.5) W2(-11.5,-5.5) W3(-10.5,-5.5) W4(-9.5,-5.5) W5(-8.5,-5.5) W6(-7.5,-5.5) W7(-6.5,-5.5) W8(-5.5,-5.5) W9(-4.5,-5.5) W10(-3.5,-5.5) W11(-2.5,-5.5) W12(-1.5,-5.5) W13(-0.5,-5.5) W14(0.5,-5.5) W15(1.5,-5.5) W16(2.5,-5.5) W17(3.5,-5.5) W18(4.5,-5.5) W19(5.5,-5.5) W20(6.5,-5.5) W21(7.5,-5.5) W22(8.5,-5.5) W23(9.5,-5.5) W24(10.5,-5.5) W25(11.5,-5.5) W26(12.5,-5.5) Y1(-12.5,-6.5) Y2(-11.5,-6.5) Y3(-10.5,-6.5) Y4(-9.5,-6.5) Y5(-8.5,-6.5) Y6(-7.5,-6.5) Y7(-6.5,-6.5) Y8(-5.5,-6.5) Y9(-4.5,-6.5) Y10(-3.5,-6.5) Y11(-2.5,-6.5) Y12(-1.5,-6.5) Y13(-0.5,-6.5) Y14(0.5,-6.5) Y15(1.5,-6.5) Y16(2.5,-6.5) Y17(3.5,-6.5) Y18(4.5,-6.5) Y19(5.5,-6.5) Y20(6.5,-6.5) Y21(7.5,-6.5) Y22(8.5,-6.5) Y23(9.5,-6.5) Y24(10.5,-6.5) Y25(11.5,-6.5) Y26(12.5,-6.5)
  silkscreen extent -14.28,-13.5 13.5,13.5, body extent -13.5,-13.5 13.5,13.5, height 2.6
FIDUCAL [mil]
  round 40 smd paste+0: 1(0,0)
  round 40 smd far side paste+0: 1_1(0,0)
FXO_HC73 [mm]
  rect 2x1.8 smd: 1(0,0) 2(0,-5.08) 3(4.2,-5.08) 4(4.2,0)
  silkscreen extent -2,-6.5 6.02,2.75
HDR1X2 [mm]
  rect 1.5x1.5 hole 0.9: 1(0,0)
  round 1.5 hole 0.9: 2(2.54,0)
  silkscreen extent -1.27,-1.27 3.81,1.27
HDR1X5 [mm] "Connector; Header; 5 Position"
  rect 1.5x1.5 hole 0.9: 1(0,0)
  round 1.5 hole 0.9: 2(2.54,0) 3(5.08,0) 4(7.62,0) 5(10.16,0)
  silkscreen extent -1.27,-1.27 11.43,1.27
HEADER_2X4_1 [mm] "HIROSE DF11 2MM PITCH"
  round 1.27 hole 0.813: 1(0,0) 2(0,2) 3(-2,0) 4(-2,2) 5(-4,0) 6(-4,2) 7(-6,0) 8(-6,2)
  silkscreen extent -7.4,-1.4 1.4,3.4
HEADER_2X5_1 [mm] "HIROSE DF11 2MM PITCH"
  round 1.27 hole 0.813: 1(0,0) 2(0,2) 3(-2,0) 4(-2,2) 5(-4,0) 6(-4,2) 7(-6,0) 8(-6,2) 9(-8,0) 10(-8,2)
  silkscreen extent -9.41,-1.4 1.4,3.4
HEADER_2X6_1 [mm] "HIROSE DF11 2MM PITCH"
  round 1.27 hole 0.813: 1(0,0) 2(0,2) 3(-2,0) 4(-2,2) 5(-4,0) 6(-4,2) 7(-6,0) 8(-6,2) 9(-8,0) 10(-8,2) 11(-10,0) 12(-10,2)
  silkscreen extent -11.4,-1.4 1.4,3.4
HEADER_2X6_2 [mil] "CONN, HEADER, 12PIN, 0.100\""
  round 60 hole 40: 1(0,0) 2(0,100) 3(100,0) 4(100,100) 5(200,0) 6(200,100) 7(300,0) 8(300,100) 9(400,0) 10(400,100) 11(500,0) 12(500,100)
  silkscreen extent -70,-70 575,180
HEADER_2X7_1 [mm] "HIROSE DF11 2MM PITCH"
  round 1.27 hole 0.813: 1(0,0) 2(0,2) 3(-2,0) 4(-2,2) 5(-4,0) 6(-4,2) 7(-6,0) 8(-6,2) 9(-8,0) 10(-8,2) 11(-10,0) 12(-10,2) 13(-12,0) 14(-12,2)
  silkscreen extent -13.59,-1.4 1.4,3.4
HEADER_2X13_2 [mil] "CONN HEADER LOPRO STR .100 26POS"
  rect 60x60 hole 40: 1(0,-1)
  round 60 hole 40: 2(0,99) 3(100,-1) 4(100,99) 5(200,-1) 6(200,99) 7(300,-1) 8(300,99) 9(400,-1) 10(400,99) 11(500,-1) 12(500,99) 13(600,-1) 14(600,99) 15(700,-1) 16(700,99) 17(800,-1) 18(800,99) 19(900,-1) 20(900,99) 21(1000,-1) 22(1000,99) 23(1100,-1) 24(1100,99) 25(1200,-1) 26(1200,99)
  silkscreen extent -215,-140 1415,240
HEADER_2X17_2 [mil] "CONN HEADER LOPRO STR .100 34POS"
  rect 60x60 hole 40: 1(0,0)
  round 60 hole 40: 2(0,100) 3(100,0) 4(100,100) 5(200,0) 6(200,100) 7(300,0) 8(300,100) 9(400,0) 10(400,100) 11(500,0) 12(500,100) 13(600,0) 14(600,100) 15(700,0) 16(700,100) 17(800,0) 18(800,100) 19(900,0) 20(900,100) 21(1000,0) 22(1000,100) 23(1100,0) 24(1100,100) 25(1200,0) 26(1200,100) 27(1300,0) 28(1300,100) 29(1400,0) 30(1400,100) 31(1500,0) 32(1500,100) 33(1600,0) 34(1600,100)
  silkscreen extent -215,-140 1815,240
IHLP-1616BZ-11 [mil]
  rect 65x90 smd: 1(-65,0) 2(65,0)
  silkscreen extent -80,-80 80,80
"LCD_HEADER_16X2_2 - SIMPLE" [mil] "HEADER FOR 16X2 CHARACTER LCD DISPLAY"
  round 72 hole 40: 1(0,0) 2(100,0) 3(200,0) 4(300,0) 5(400,0) 6(500,0) 7(600,0) 8(700,0) 9(800,0) 10(900,0) 11(1000,0) 12(1100,0) 13(1200,0) 14(1300,0) 15(1400,0) 16(1500,0)
  silkscreen extent -69,-57 1555,61
"LED 1206" [mil]
  rect 60x60 smd: 1(0,0) 2(130,0)
  silkscreen extent -45,-45 190,45
"MSOP8 PowerPAD" [mm]
  rect 1.57x1.89 smd: 0(2.1,-0.975)
  rect 1.6x0.4 smd: 1(0,0)
  oval 1.6x0.4 smd: 2(0,-0.65) 3(0,-1.3) 4(0,-1.95) 5(4.2,-1.95) 6(4.2,-1.3) 7(4.2,-0.65) 8(4.2,0)
  silkscreen extent 1.1,-2.27 3.1,0.33
"PBSW SMD" [mil]
  rect 50x50 smd: 1(0,0) 1_1(0,217) 2(100,0) 2_1(100,217)
  silkscreen extent -25,-53 125,182
"RS232 HEADER" [mil]
  round 62 hole 38: 1(0,0) 2(0,100) 3(0,200) 4(0,300) 5(0,400) 6(-100,0) 7(-100,100) 8(-100,200) 9(-100,300) 10(-100,400)
  silkscreen extent -219,-194 150,594
SM/C_0402 [mil]
  rect 22x22 smd: 1(0,0) 2(42,0)
  silkscreen extent 22,-8 22,8
SM/C_0603 [mil]
  rect 32x38 smd: 1(0,0) 2(56,0)
  silkscreen extent -29,-33 86,32
SM/C_1206 [mil]
  rect 60x60 smd: 1(0,0) 2(130,0)
  silkscreen extent -45,-45 175,45
SM/CT_6032 [mil]
  rect 104x88 smd: N(196,0) P(0,0)
  silkscreen extent -79,-70 263,70
SM/CT_7360 [mil]
  rect 104x160 smd: N(260,0) P(0,0)
  silkscreen extent -80,-140 328,140
SM/D_0603 [mil] "0603 Diode"
  rect 32x38 smd: 1(0,0) 2(56,0)
  silkscreen extent -29,-32 86,32
SM/R_0402 [mil]
  rect 22x22 smd: 1(0,0) 2(42,0)
  silkscreen extent 22,-8 22,8
SM/R_0603 [mil]
  rect 32x38 smd: 1(0,0) 2(56,0)
  silkscreen extent 28,-16 28,16
SM/R_0805 [mil]
  rect 50x50 smd: 1(0,0) 2(84,0)
  silkscreen extent -38,-37 122,38
SM/SOT223_1234 [mil]
  rect 48x88 smd: 1(0,0) 2(90,0) 3(180,0)
  rect 142x88 smd: 4(90,244)
  silkscreen extent -42,49 222,195
"SMD - Fuse" [mil]
  rect 167x150 smd: 1(0,0) 2(251,0)
  silkscreen extent 124,-71 124,76
SO8W_M [mm]
  oval 2.5x0.7 smd: 1(-3.45,1.905) 2(-3.45,0.635) 3(-3.45,-0.635) 4(-3.45,-1.905) 5(3.45,-1.905) 6(3.45,-0.635) 7(3.45,0.635) 8(3.45,1.905)
  silkscreen extent -3.57,-2.75 1.8,2.93
SO-16_SMALL_OUTLINE [mil] "OPTOCOUPLER SO-16 PACKAGE"
  rect 30x80 smd: 1(0,0) 2(-50,0) 3(-100,0) 4(-150,0) 5(-200,0) 6(-250,0) 7(-300,0) 8(-350,0) 9(-350,-235) 10(-300,-235) 11(-250,-235) 12(-200,-235) 13(-150,-235) 14(-100,-235) 15(-50,-235) 16(0,-235)
  silkscreen extent -380,-175 57,-23
SOG.65M/16/WG8.20/L6.35 [mil]
  oval 16x90 smd: 1(0,0) 2(25.6,0) 3(51.2,0) 4(76.8,0) 5(102.4,0) 6(128,0) 7(153.6,0) 8(179.2,0) 9(179.2,270) 10(153.6,270) 11(128,270) 12(102.4,270) 13(76.8,270) 14(51.2,270) 15(25.6,270) 16(0,270)
  silkscreen extent -35,60 215,210
SOT23-5 [mil]
  oval 25x50 smd: 1(0,0) 2(40,0) 3(80,0) 4(80,100) 5(0,100)
  silkscreen extent -20,30 100,70
SOT23-6 [mm]
  rect 0.55x1.45 smd: 1(-0.95,-1.075) 2(0,-1.075) 3(0.95,-1.075) 4(0.95,1.075) 5(0,1.075) 6(-0.95,1.075)
  silkscreen extent -1.57,-1.35 1.55,0.9
SPST_SMT8 [mil]
  rect 100x50 smd: 1(0,0) 2(0,-100) 3(0,-200) 4(0,-300) 5(339,-300) 6(339,-200) 7(339,-100) 8(339,0)
  silkscreen extent 85,-350 254,50
STANDOFF_0.156 [mil] "6/32 STANDOFF"
  round 250 hole 156: 1(0,0)
"TDX Inductor" [mm]
  rect 1.3x3.4 smd: 1(-2.15,0) 2(2.15,0)
  silkscreen extent -1.1,-1.6 1.1,1.6
TO236AA/SOT23 [mil]
  rect 40x56 smd: 1(0,-6) 2(75,-6) 3(37.5,69)
  silkscreen extent -28,36 97,66
TSOP56 [mm]
  rect 0.3x1.6 smd: 1(-6.75,-9.6) 2(-6.25,-9.6) 3(-5.75,-9.6) 4(-5.25,-9.6) 5(-4.75,-9.6) 6(-4.25,-9.6) 7(-3.75,-9.6) 8(-3.25,-9.6) 9(-2.75,-9.6) 10(-2.25,-9.6) 11(-1.75,-9.6) 12(-1.25,-9.6) 13(-0.75,-9.6) 14(-0.25,-9.6) 15(0.25,-9.6) 16(0.75,-9.6) 17(1.25,-9.6) 18(1.75,-9.6) 19(2.25,-9.6) 20(2.75,-9.6) 21(3.25,-9.6) 22(3.75,-9.6) 23(4.25,-9.6) 24(4.75,-9.6) 25(5.25,-9.6) 26(5.75,-9.6) 27(6.25,-9.6) 28(6.75,-9.6) 29(6.75,9.6) 30(6.25,9.6) 31(5.75,9.6) 32(5.25,9.6) 33(4.75,9.6) 34(4.25,9.6) 35(3.75,9.6) 36(3.25,9.6) 37(2.75,9.6) 38(2.25,9.6) 39(1.75,9.6) 40(1.25,9.6) 41(0.75,9.6) 42(0.25,9.6) 43(-0.25,9.6) 44(-0.75,9.6) 45(-1.25,9.6) 46(-1.75,9.6) 47(-2.25,9.6) 48(-2.75,9.6) 49(-3.25,9.6) 50(-3.75,9.6) 51(-4.25,9.6) 52(-4.75,9.6) 53(-5.25,9.6) 54(-5.75,9.6) 55(-6.25,9.6) 56(-6.75,9.6)
  silkscreen extent -7.57,-9.72 7.05,8.4
"TSSOP20 - PWP" [mm]
  rect 3.7x2.4 smd: 0(0,0)
  rect 0.3x1.6 smd: 1(-2.925,-2.75) 2(-2.275,-2.75) 3(-1.625,-2.75) 4(-0.975,-2.75) 5(-0.325,-2.75) 6(0.325,-2.75) 7(0.975,-2.75) 8(1.625,-2.75) 9(2.275,-2.75) 10(2.925,-2.75) 11(2.925,2.75) 12(2.275,2.75) 13(1.625,2.75) 14(0.975,2.75) 15(0.325,2.75) 16(-0.325,2.75) 17(-0.975,2.75) 18(-1.625,2.75) 19(-2.275,2.75) 20(-2.925,2.75)
  silkscreen extent -3.75,-2.87 3.3,1.55